# Altium PCB mcc v1.0.0.PcbDoc
Units mm, origin at the board's own origin, x right, y up, seen from the top; angles counter-clockwise.
Board outline 66.63 x 86.36 mm, 4 copper layers (Top Layer, GND, PWR, Bottom Layer); 61 components, 73 nets, 377 pads, 91 vias.
Unrouted connection lines stored in the file: 3.
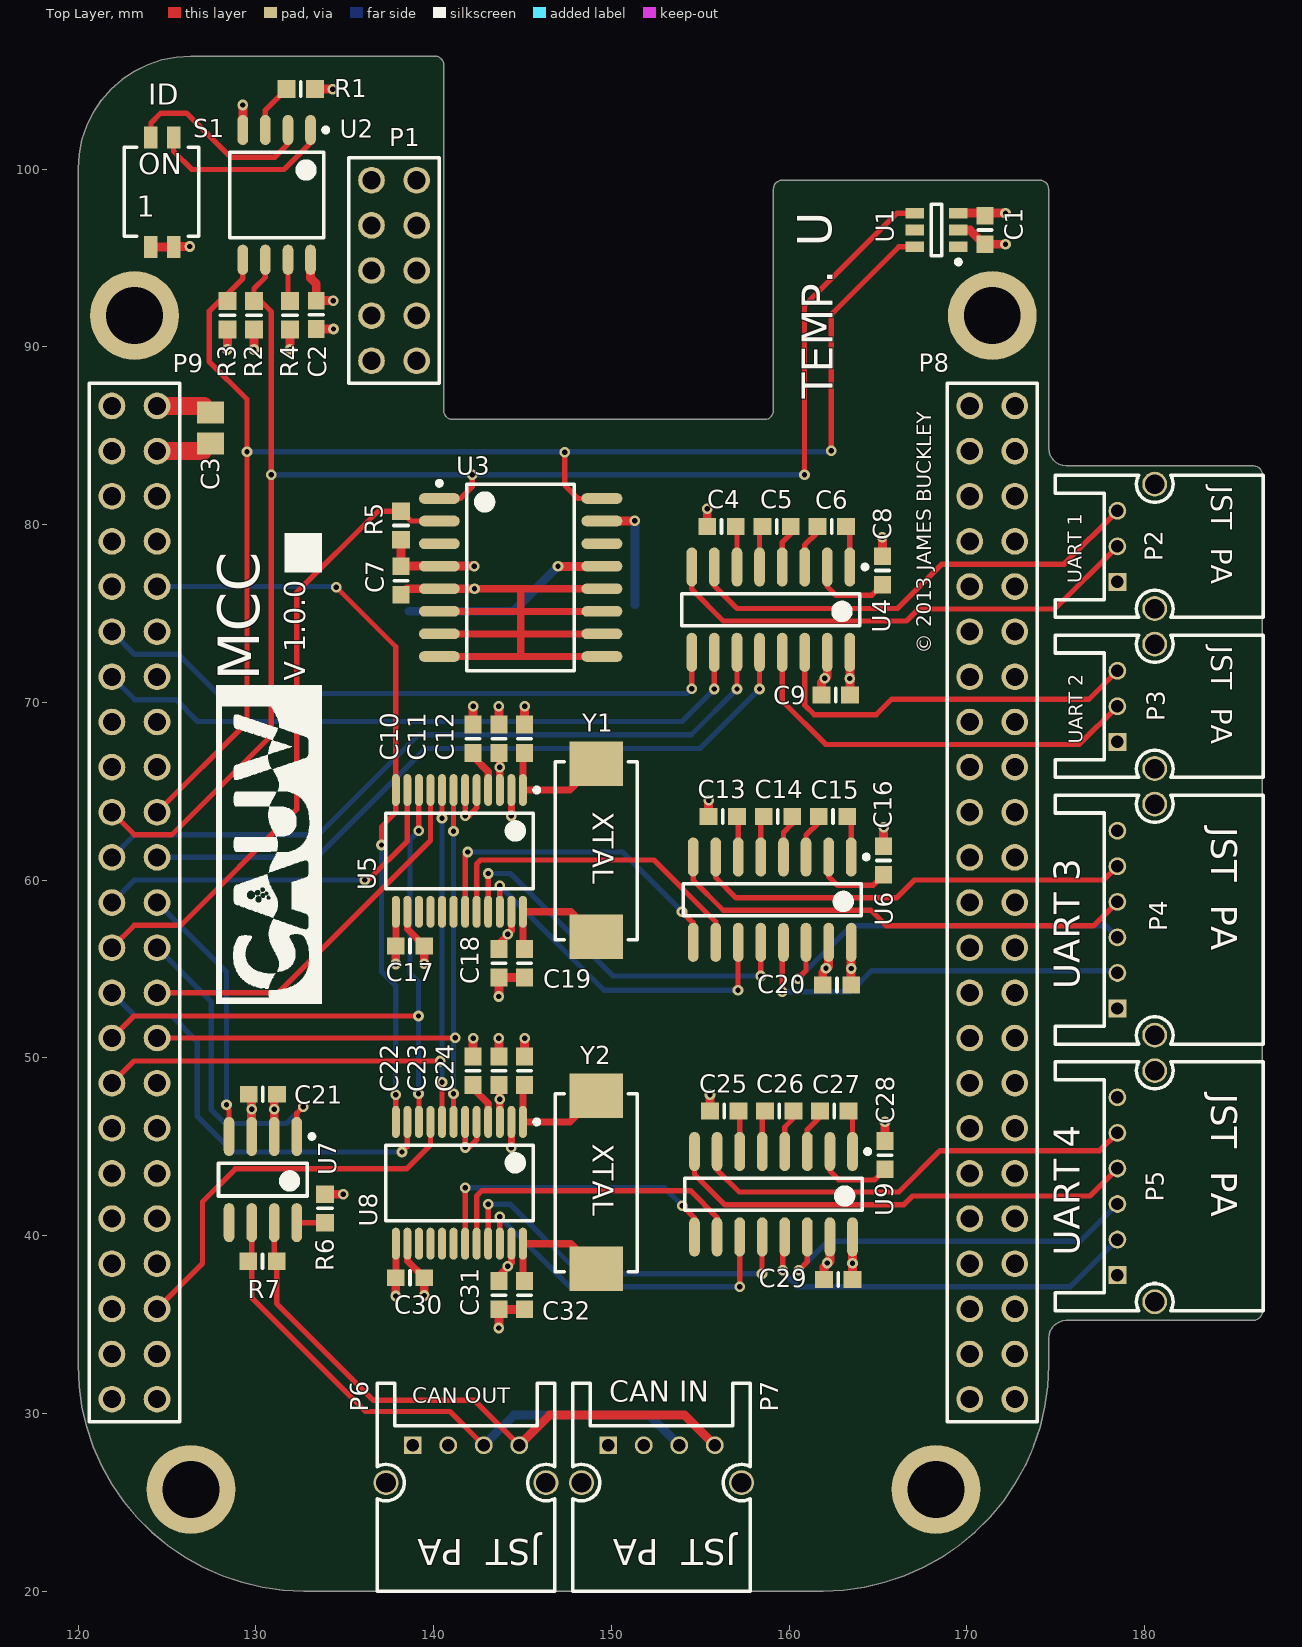
[diagram p0: Top Layer view]
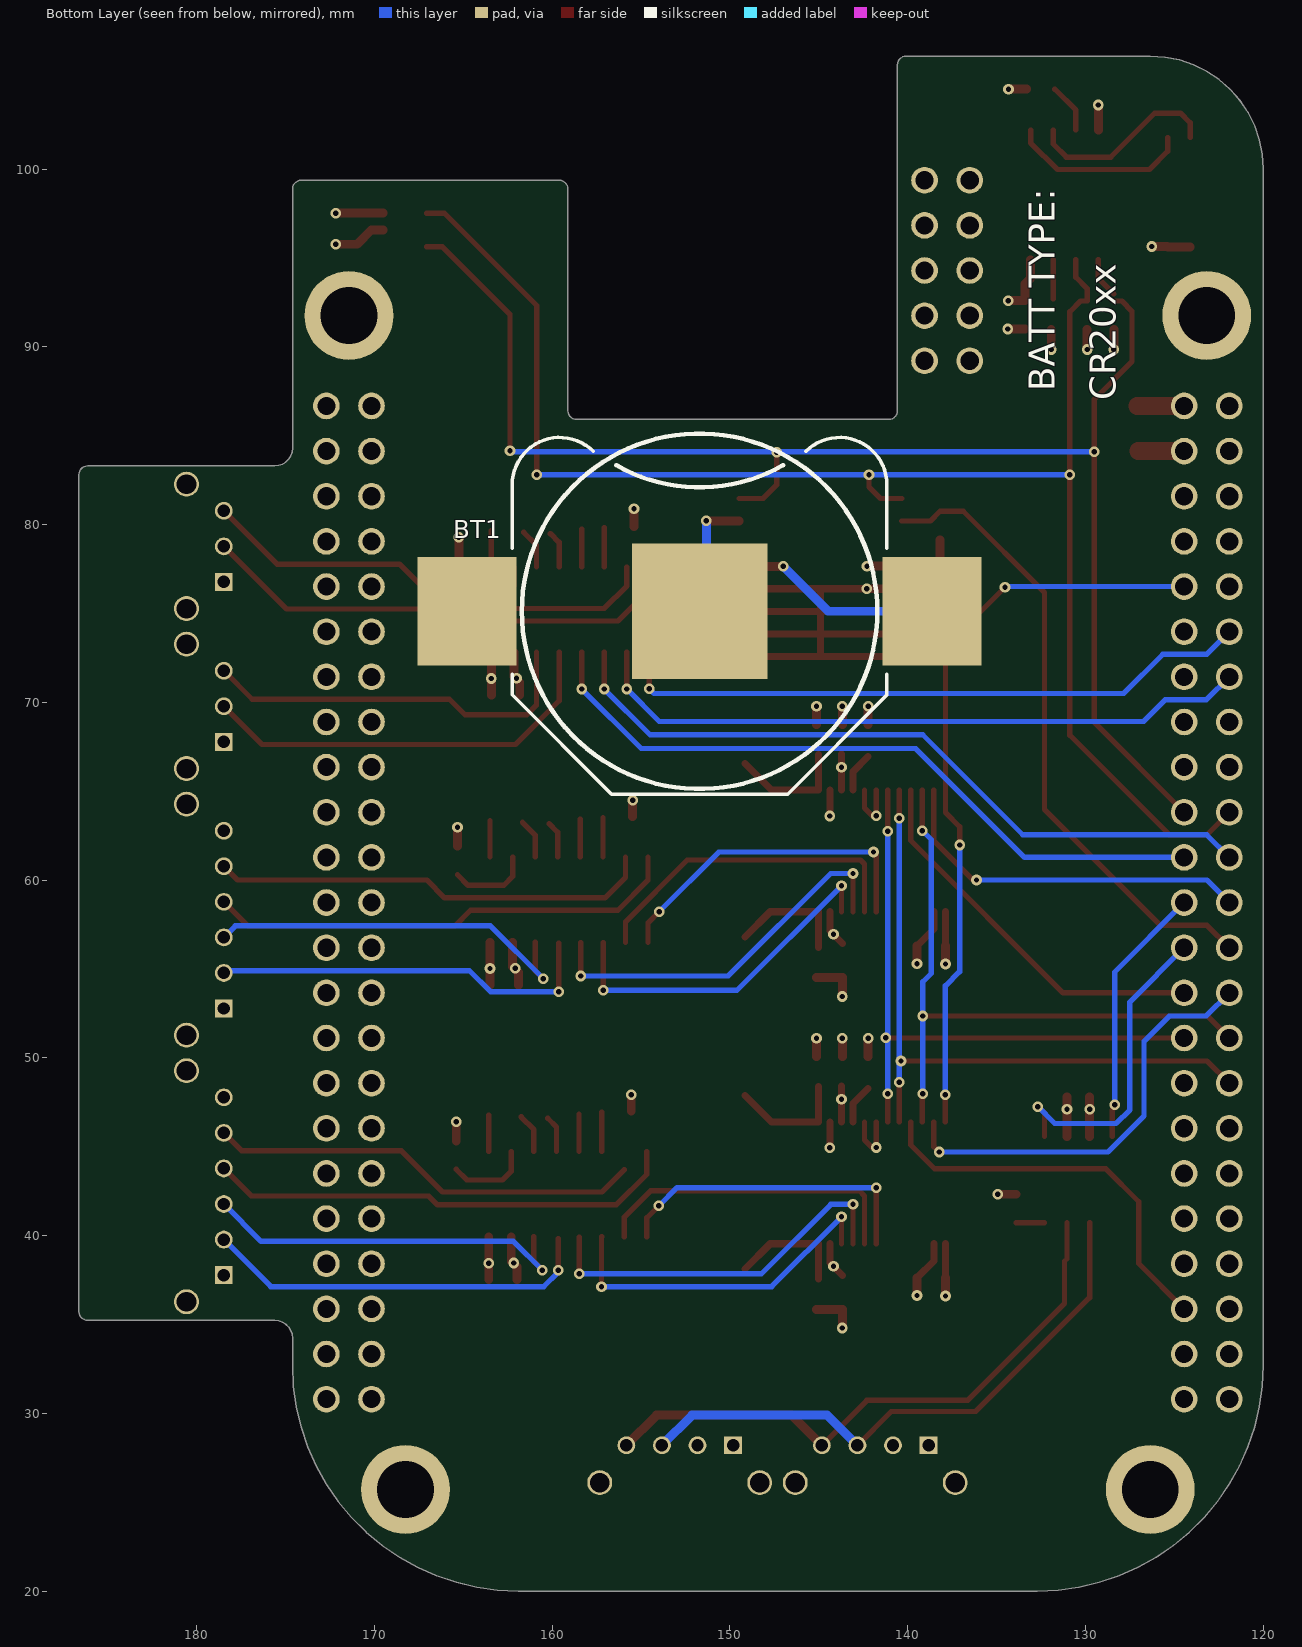
[diagram p1: Bottom Layer view, seen from below]
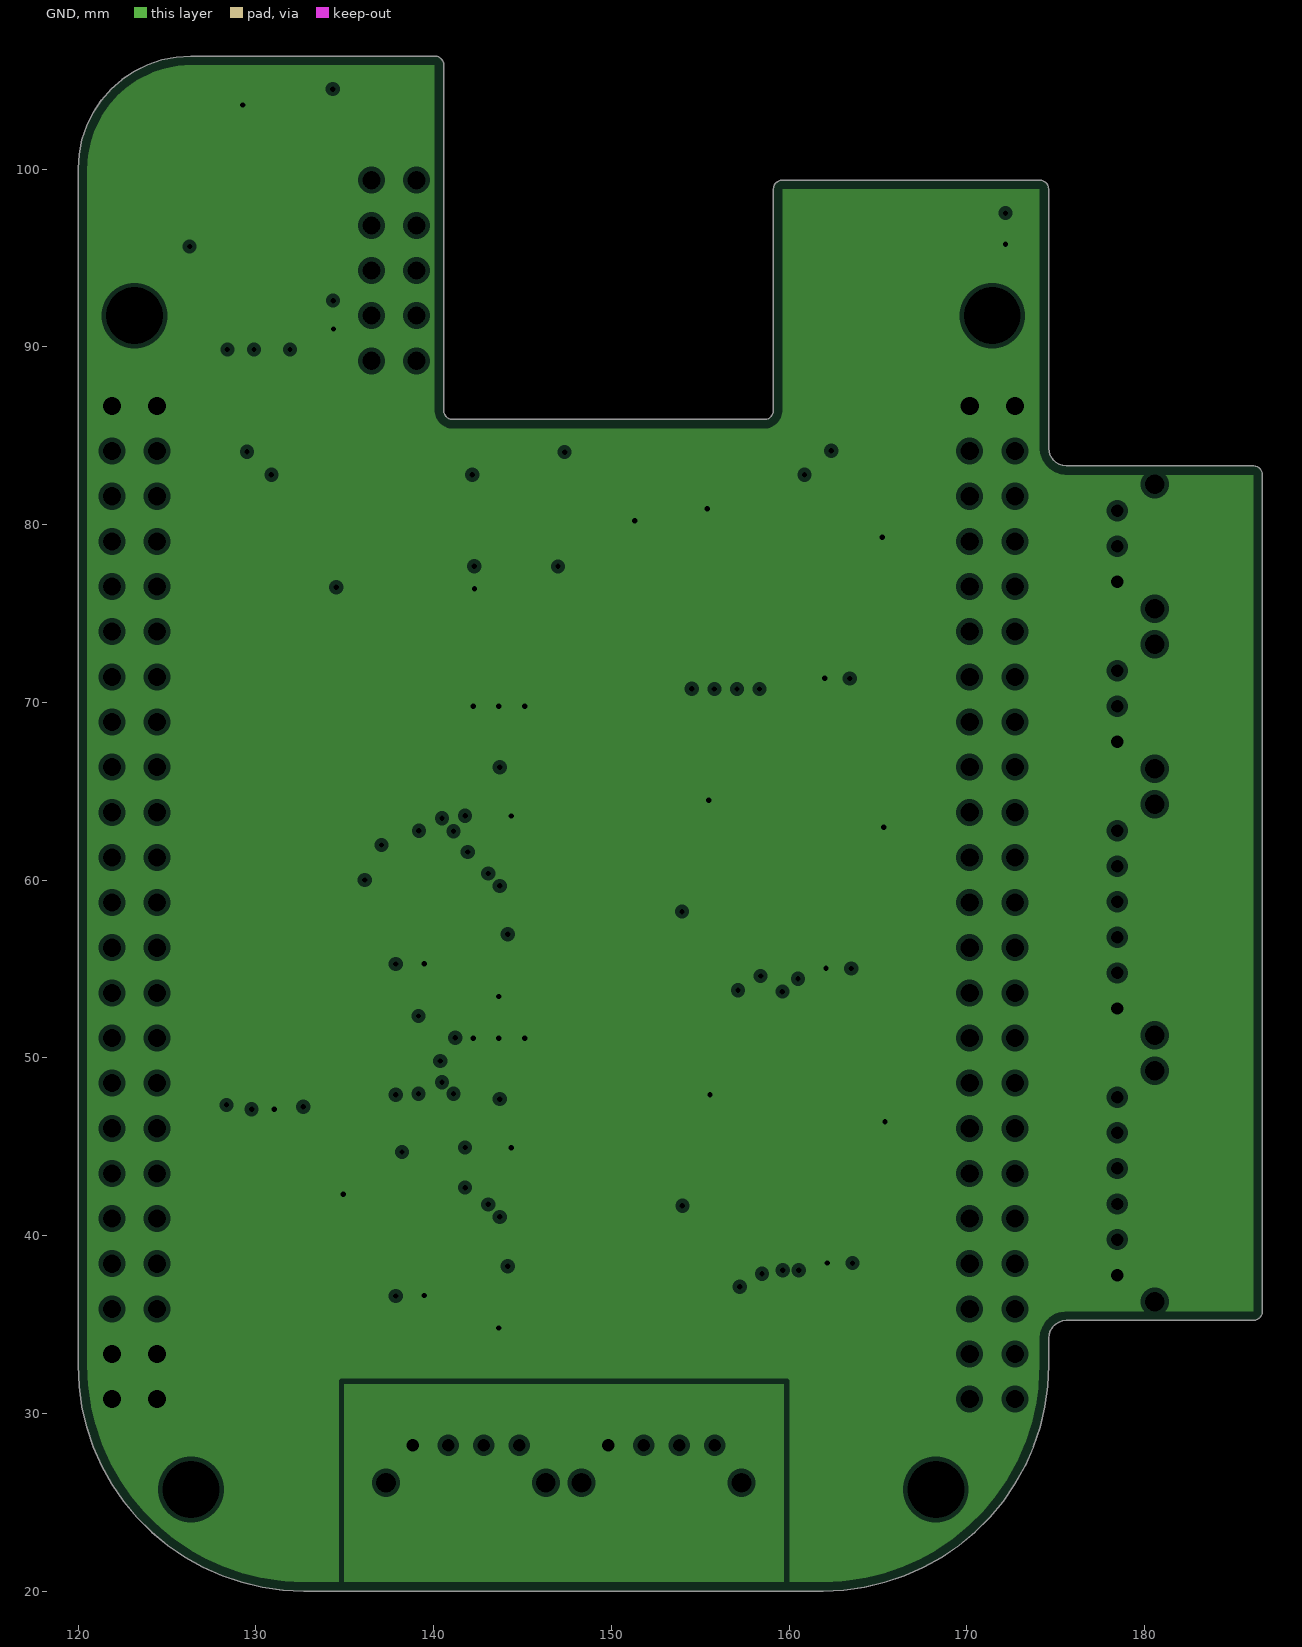
[diagram p2: GND, clearances drawn from the general rule]
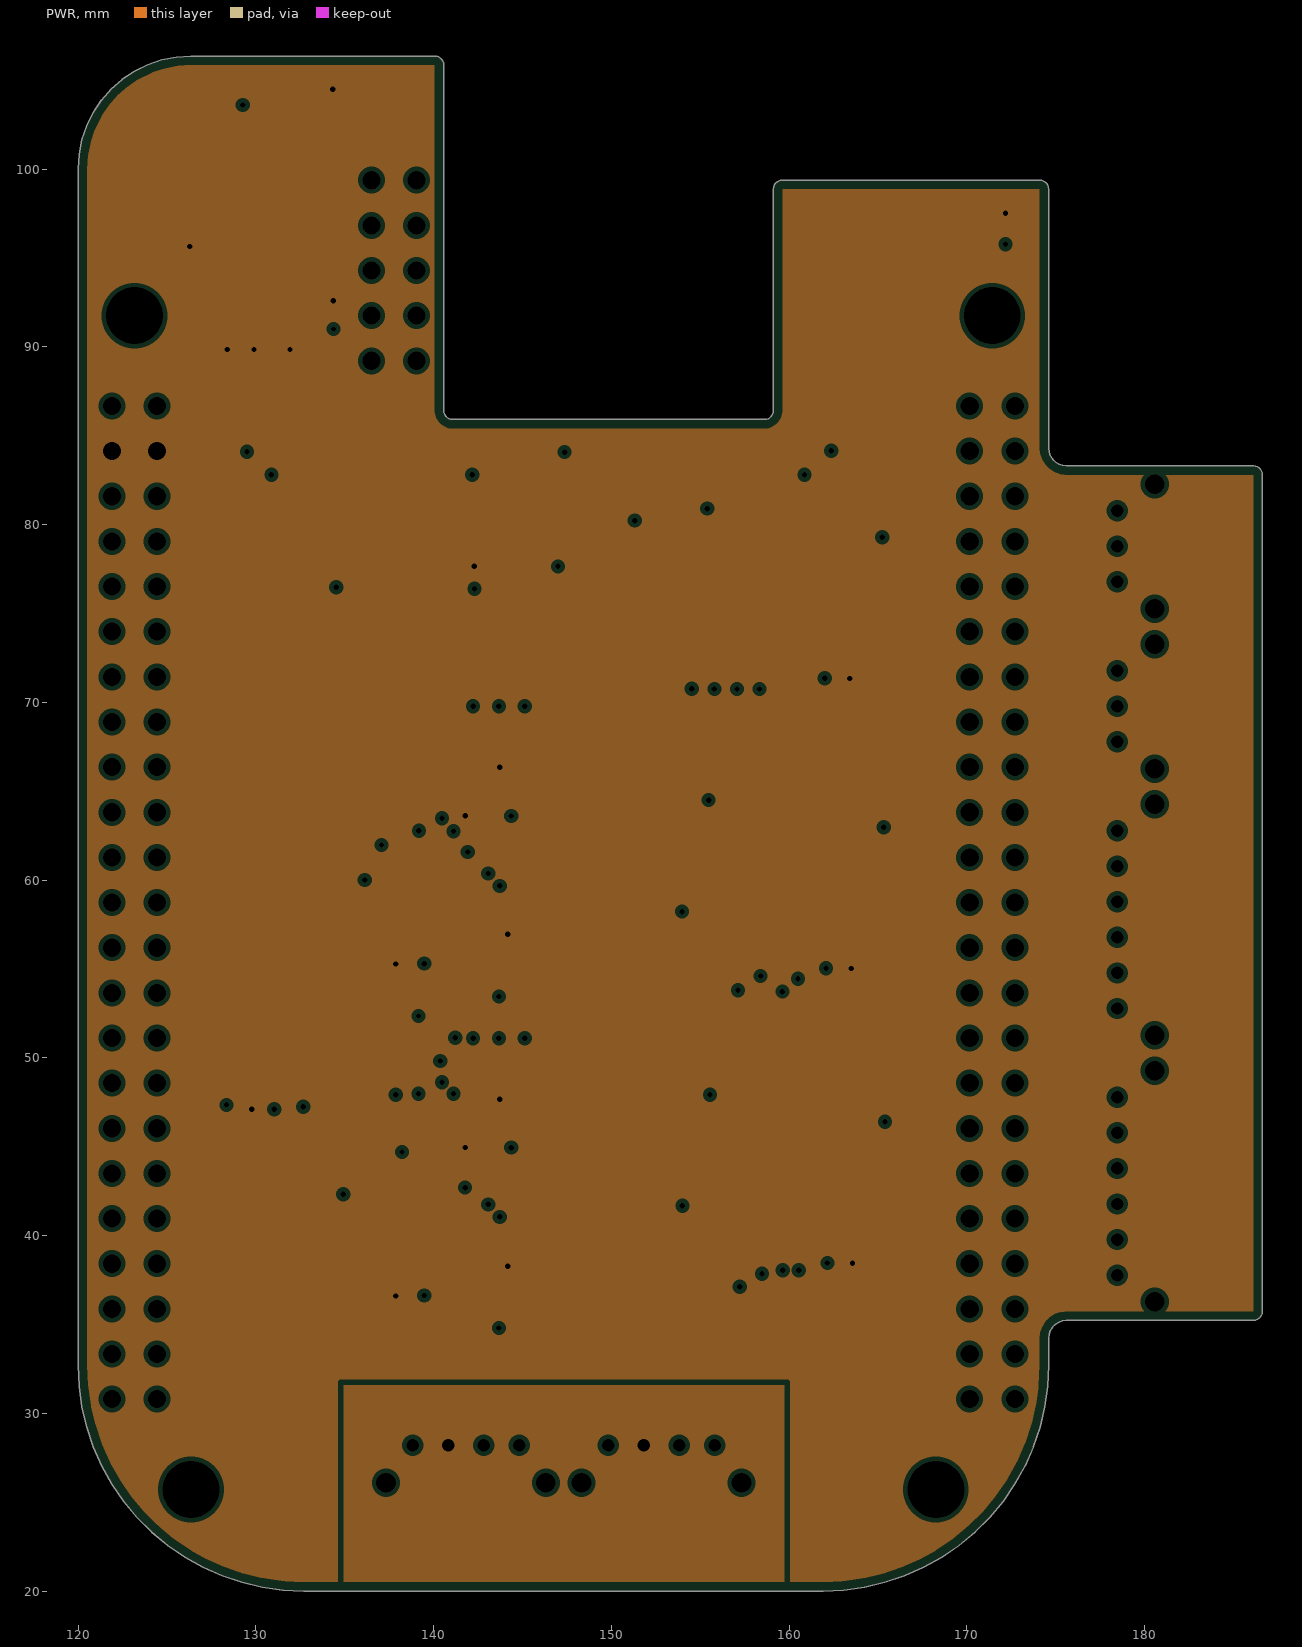
[diagram p3: PWR, clearances drawn from the general rule]

## Layer stack, top to bottom
Top Layer: signal copper 0.0356
Dielectric: core 0.32, FR-4, Dk 4.8
GND: plane copper 0.0356, net GND
Dielectric: prepreg 0.32, FR-4, Dk 4.8
PWR: plane copper 0.0356, net (Multiple Nets)
Dielectric: core 0.32, FR-4, Dk 4.8
Bottom Layer: signal copper 0.0356

## Board outline
159.616,99.375 174.11,99.375 174.221,99.362 174.327,99.325 174.422,99.266 174.501,99.187 174.56,99.092 174.597,98.986 174.61,98.875 174.61,84.305 174.635,84.082 174.709,83.871 174.828,83.681 174.987,83.523 175.176,83.404 175.387,83.33 175.61,83.305 186.13,83.305 186.241,83.292 186.347,83.255 186.442,83.196 186.521,83.117 186.58,83.022 186.617,82.916 186.63,82.805 186.63,35.73 186.617,35.619 186.58,35.513 186.521,35.418 186.442,35.339 186.347,35.279 186.241,35.243 186.13,35.23 175.61,35.23 175.387,35.205 175.176,35.131 174.987,35.012 174.828,34.853 174.709,34.664 174.635,34.453 174.61,34.23 174.61,32.7 174.556,31.528 174.394,30.366 174.125,29.224 173.752,28.112 173.279,27.039 172.708,26.014 172.045,25.047 171.295,24.144 170.466,23.315 169.563,22.565 168.596,21.902 167.571,21.331 166.498,20.858 165.386,20.485 164.244,20.216 163.082,20.054 161.91,20 132.7,20 131.528,20.054 130.366,20.216 129.224,20.485 128.112,20.858 127.039,21.331 126.014,21.902 125.047,22.565 124.144,23.315 123.315,24.144 122.565,25.047 121.902,26.014 121.331,27.039 120.858,28.112 120.485,29.224 120.216,30.366 120.054,31.528 120,32.7 120,100.01 120.054,100.839 120.216,101.653 120.483,102.44 120.851,103.185 121.312,103.876 121.86,104.5 122.484,105.048 123.175,105.509 123.92,105.877 124.706,106.144 125.521,106.306 126.35,106.36 140.074,106.36 140.185,106.347 140.291,106.31 140.386,106.251 140.465,106.172 140.524,106.077 140.561,105.971 140.574,105.86 140.574,86.413 140.587,86.302 140.624,86.196 140.683,86.101 140.762,86.022 140.857,85.963 140.963,85.926 141.074,85.913 158.616,85.913 158.727,85.926 158.833,85.963 158.928,86.022 159.007,86.101 159.066,86.196 159.103,86.302 159.116,86.413 159.116,98.875 159.129,98.986 159.166,99.092 159.225,99.187 159.304,99.266 159.399,99.325 159.505,99.362

## Design rules (kind name [scope] priority, off if disabled: settings)
Clearance [All] p1: gap=0.15
ComponentClearance [All] p1: gap=0.25 collisioncheckmode=3 verticalgap=0.25 showdistances=FALSE
DiffPairsRouting [All] p1: maxlimit=0.3 minlimit=0.2 mostfreqgap=0.26 maxuncoupledlength=12.7
HoleSize [All] p1: absolutevalues=TRUE maxlimit=10 minlimit=0.2 maxpercent=80.000 minpercent=20.000
HoleToHoleClearance [All] p1: gap=0.25 allowstackedmicrovias=TRUE
MinimumAnnularRing [All] p1: minimumring=0.15
MinimumSolderMaskSliver [All] p1: minsoldermaskwidth=0.125
PlaneClearance [All] p1: clearance=0.25
PlaneConnect [All] p1: planeconnectstyle=Relief reliefexpansion=0.5 reliefentries=4 reliefconductorwidth=0.25 reliefairgap=0.25
PolygonConnect [All] p1: connectstyle=Relief reliefconductorwidth=0.25 reliefentries=4 polygonreliefangle="90 Angle"
RoutingVias [All] p1: holewidth=0.3 width=0.6 viastyle="Through Hole" minholewidth=0.3 minwidth=0.6 maxholewidth=0.4 maxwidth=0.8
SilkToSilkClearance [All] p1: silktosilkclearance=0.25
SilkscreenOverComponentPads [All] p1: minsilkscreentomaskgap=0.125
SolderMaskExpansion ViaCovering [(IsVia)] p1: expansion=-10
SolderMaskExpansion [All] p2: expansion=0.125
Width Power [InNetClass('Power')] p1: maxlimit=10 minlimit=0.25 preferedwidth=0.5
Width General [All] p2: maxlimit=10 minlimit=0.2 preferedwidth=0.3
19 further rules are at their usual default settings.

## Classes and differential pairs
component class U_Power: C3
component class U_temp_sensor: C1 U1
component class "U_bb header": P1 P2 P6 P7 P8
component class U_3: C21 R6 U2 U7
component class "U_i2c pullups": R2 R3 R4 R5 R6
net class Power: +3.3 +5 GND
component class "U_CAN Termination Connector (JST)": P5 P6 P7 P8 R3 R7
component class U_eeprom: C2 C21 R1 R4 S1 U2 U7
component class U_MAX31071: C2 C5 C6 C7 C10 C11 C12 C17 C18 C19 C22 C30 U3 U5 Y1
component class U_MAX31072: C10 C11 C12 C13 C14 C18 C22 C23 C24 C30 C31 C32 U4 U8 Y2
component class U_rs232_conn: P2 P3 P4 P5 P6 P7 P8 P9
component class "U_RS232 Transciever (MAX232)1": C4 C5 C6 C8 C9 C13 C17 C19 C25 C32 U3 U4
component class "U_RS232 Transciever (MAX232)2": C5 C9 C13 C14 C15 C16 C20 C22 C23 C26 U4 U6
component class "U_RS232 Transciever (MAX232)3": C1 C6 C15 C25 C26 C27 C28 C29 U6 U9
component class U_rtc: BT1 C7 C8 R5 R7 U3 U9
channel class max3107: U_MAX31071 U_MAX31072
channel class "RS232 Transciever (MAX232)": "U_RS232 Transciever (MAX232)1" "U_RS232 Transciever (MAX232)2" "U_RS232 Transciever (MAX232)3"

## Components (designator, comment, footprint, x,y, rotation, side; value= is the part's Value field where it differs from the comment)
BT1 "Battery" 3002 167.075,75.125 r180 bottom
C1 "Cap" C0603 171.025,96.575 r90 top (schematic designator C9)
C2 "Cap" C0603 133.4,91.8 r90 top (schematic designator C1)
C3 "Cap Pol1" C0805 127.45,85.45 r90 top (schematic designator C1)
C4 "Cap" C0603 156.2,79.891 r180 top (schematic designator C5)
C5 "Cap" C0603 159.3,79.891 r180 top (schematic designator C4)
C6 "Cap" C0603 162.4,79.891 r180 top (schematic designator C3)
C7 "Cap" C0603 138.175,76.85 r270 top (schematic designator C8)
C8 "Cap" C0603 165.25,77.416 r90 top (schematic designator C2)
C9 "Cap" C0603 162.625,70.416 r180 top (schematic designator C1)
C10 "Cap" C0603 142.225,67.95 r270 top (schematic designator C3)
C11 "Cap" C0603 143.675,67.95 r90 top (schematic designator C4)
C12 "Cap" C0603 145.125,67.95 r90 top (schematic designator C6)
C13 "Cap" C0603 156.275,63.575 r180 top (schematic designator C5)
C14 "Cap" C0603 159.375,63.575 r180 top (schematic designator C4)
C15 "Cap" C0603 162.475,63.575 r180 top (schematic designator C3)
C16 "Cap" C0603 165.325,61.1 r90 top (schematic designator C2)
C17 "Cap" C0603 138.675,56.3 r0 top (schematic designator C2)
C18 "Cap" C0603 143.675,55.325 r270 top (schematic designator C5)
C19 "Cap" C0603 145.125,55.325 r270 top (schematic designator C7)
C20 "Cap" C0603 162.7,54.1 r180 top (schematic designator C1)
C21 "Cap" C0603 130.4,47.95 r0 top (schematic designator C1)
C22 "Cap" C0603 142.225,49.275 r270 top (schematic designator C3)
C23 "Cap" C0603 143.675,49.275 r90 top (schematic designator C4)
C24 "Cap" C0603 145.125,49.275 r90 top (schematic designator C6)
C25 "Cap" C0603 156.35,47 r180 top (schematic designator C5)
C26 "Cap" C0603 159.45,47 r180 top (schematic designator C4)
C27 "Cap" C0603 162.55,47 r180 top (schematic designator C3)
C28 "Cap" C0603 165.4,44.525 r90 top (schematic designator C2)
C29 "Cap" C0603 162.775,37.525 r180 top (schematic designator C1)
C30 "Cap" C0603 138.675,37.625 r0 top (schematic designator C2)
C31 "Cap" C0603 143.675,36.65 r270 top (schematic designator C5)
C32 "Cap" C0603 145.125,36.65 r270 top (schematic designator C7)
P1 "Header 5X2" TSW-105-07-T-D_DOWN 139.05,89.215 r90 top
P2 "Header 3H" S03B-PASK-2 178.475,80.775 r270 top (schematic designator P5)
P3 "Header 3H" S03B-PASK-2 178.475,71.775 r270 top (schematic designator P4)
P4 "Header 6H" S06B-PASK-2 178.475,47.775 r270 top (schematic designator P2)
P5 "Header 6H" S06B-PASK-2 178.475,62.775 r270 top (schematic designator P3)
P6 "Header 4" S04B-PASK-2 144.825,28.2 r180 top (schematic designator P1)
P7 "Header 4" S04B-PASK-2 155.825,28.2 r180 top (schematic designator P2)
P8 "Header 23X2" TSW-123-07-T-D_DOWN 170.165,86.675 r270 top
P9 "Header 23X2" TSW-123-07-T-D_DOWN 121.905,86.675 r270 top
R1 "Res2" R0603 132.525,104.5 r0 top
R2 "Res2" R0603 129.9,91.775 r270 top (schematic designator R4)
R3 "Res2" R0603 128.4,91.775 r270 top
R4 "Res2" R0603 131.925,91.775 r270 top (schematic designator R2)
R5 "Res" R0603 138.175,79.95 r90 top
R6 "Res" R0603 133.9,41.525 r270 top (schematic designator R1)
R7 "Res2" R0603 130.375,38.55 r180 top (schematic designator R1)
S1 "SW DIP-2" MCDHN-02F-V 124.1,95.625 r0 top
U1 "AD7414" AD7414 168.3,96.575 r180 top (schematic designator U4)
U2 "CAT24C256" CAT24C256-SOIC 131.175,98.55 r270 top (schematic designator U1)
U3 "DS1374C" DS1374C 144.9,77.025 r0 top
U4 "TRSF3232EID" SOIC127P600X175-16N 158.976,75.216 r270 top (schematic designator U1)
U5 "MAX3107" MAX3107 141.452,61.641 r270 top (schematic designator U2)
U6 "TRSF3232EID" SOIC127P600X175-16N 159.051,58.9 r270 top (schematic designator U1)
U7 "SN65HVD230DR" SN65HVD230DR 130.4,43.15 r270 top (schematic designator U1)
U8 "MAX3107" MAX3107 141.452,42.966 r270 top (schematic designator U2)
U9 "TRSF3232EID" SOIC127P600X175-16N 159.126,42.325 r270 top (schematic designator U1)
Y1 "XTAL" FQ1045A-3.6864 149.15,66.55 r270 top
Y2 "XTAL" FQ1045A-3.6864 149.15,47.875 r270 top (schematic designator Y1)

## Footprints (in the part's own frame and the unit in brackets; to place one, negate y for a bottom-side part, rotate by r counter-clockwise, add the part's x,y. Pads: shape width x height; smd on the part's side, far side on the other; paste and mask are expansions set on the pad)
3002 [mil] "KEYSTONE - 3002 - BATTERY SMD RETAINER, 20MM"
  rect 220x240 smd: 1(90,0) 1(1120,0)
  rect 300x300 smd: 2(605,0)
  silkscreen extent 190,-405 1020,394, body extent 0,-405 1210,384, height 156
AD7414 [mm] "ANALOG DEVICES - AD7414ARTZ-0500RL7. - TEMP SENSOR, 10BIT, SMB/12C, SOT23-6"
  rect 1.05x0.6 smd paste+0 mask+0.175: 1(-1.225,0.95) 2(-1.225,0) 3(-1.225,-0.95) 4(1.225,-0.95) 5(1.225,0) 6(1.225,0.95)
  silkscreen extent -1.35,-1.45 0.3,1.92, body extent -0.8,-1.45 0.8,1.45, height 1.45
C0603 [mm] "Chip Capacitor, 2-Leads, Body 1.6x0.8mm, IPC Medium Density"
  rect 1x0.95 smd: 1(-0.8,0) 2(0.8,0)
  silkscreen extent 0,-0.38 0,0.38, body extent -0.88,-0.48 0.87,0.48, height 0.8
C0805 [mm] "KEMET - C0805C104K5RACTU - CAPACITOR, 0805, 100NF, 50V, X7R"
  rect 1.25x1.5 smd: 1(-0.889,0) 2(0.861,0)
  body extent -1.12,-0.72 1.09,0.72, height 1
CAT24C256-SOIC [mm] "CAT24C256 256 kb I2  C CMOS Serial  EEPROM"
  oval 1.7x0.6 smd: 1(-3.65,1.905) 2(-3.65,0.635) 3(-3.65,-0.635) 4(-3.65,-1.905) 5(3.65,-1.905) 6(3.65,-0.635) 7(3.65,0.635) 8(3.65,1.905)
  silkscreen extent -3.77,-2.65 2.4,2.88, body extent -2.69,-2.67 2.69,2.67, height 2.03
DS1374C [mm] "DS1374 I2C, 32-Bit Binary Counter Watchdog RTC with Trickle Charger and Reset Input/Output"
  oval 2.3x0.6 smd: 1(-4.575,4.445) 2(-4.575,3.175) 3(-4.575,1.905) 4(-4.575,0.635) 5(-4.575,-0.635) 6(-4.575,-1.905) 7(-4.575,-3.175) 8(-4.575,-4.445) 9(4.575,-4.445) 10(4.575,-3.175) 11(4.575,-1.905) 12(4.575,-0.635) 13(4.575,0.635) 14(4.575,1.905) 15(4.575,3.175) 16(4.575,4.445)
  silkscreen extent -4.7,-5.25 3.03,5.42, body extent -3.8,-5.25 3.8,5.25, height 2.65
FQ1045A-3.6864 [mm] "FOX ELECTRONICS - FQ1045A-3.6864 - CRYSTAL, 4.5X10MM, CER, 3.6864MHZ"
  rect 2.5x3 smd: 1(0,0) 2(9.75,0)
  silkscreen extent -0.1,-2.3 9.9,2.3, body extent -0.07,-2.25 9.93,2.25, height 1.7
MAX3107 [mm] "Maxim Integrated MAX3107EAG+"
  oval 1.8x0.45 smd: 1(-3.425,3.575) 2(-3.425,2.925) 3(-3.425,2.275) 4(-3.425,1.625) 5(-3.425,0.975) 6(-3.425,0.325) 7(-3.425,-0.325) 8(-3.425,-0.975) 9(-3.425,-1.625) 10(-3.425,-2.275) 11(-3.425,-2.925) 12(-3.425,-3.575) 13(3.425,-3.575) 14(3.425,-2.925) 15(3.425,-2.275) 16(3.425,-1.625) 17(3.425,-0.975) 18(3.425,-0.325) 19(3.425,0.325) 20(3.425,0.975) 21(3.425,1.625) 22(3.425,2.275) 23(3.425,2.925) 24(3.425,3.575)
  silkscreen extent -3.55,-4.15 2.12,4.47, body extent -2.69,-4.17 2.69,4.17, height 1.99
MCDHN-02F-V [mm] "MULTICOMP - MCDHN-02F-V - SWITCH, DIP, SMD, 2 WAY"
  rect 0.76x1.25 smd: 1(0,0) 2(1.27,0) 3(1.27,6.15) 4(0,6.15)
  silkscreen extent -1.5,0.6 2.7,5.6, body extent -1.3,0.83 2.47,5.33, height 1.5
R0603 [mm]
  rect 1x1 smd: 1(-0.8,0) 2(0.8,0)
  silkscreen extent 0,-0.4 0,0.4, body extent -0.85,-0.48 0.85,0.47, height 0.45
S03B-PASK-2 [mm] "JST (JAPAN SOLDERLESS TERMINALS) - S03B-PASK-2 - HEADER, PA, 3WAY, SIDE, 2MM"
  rect 1x1 hole 0.7: 1(4,0)
  round 1 hole 0.7: 2(2,0) 3(0,0)
  round 1.4 hole 1.1: ""(-1.5,2.1) ""(5.5,2.1)
  silkscreen extent -2,-3.5 6,8.2, body extent -2,-3.5 6,8.2, height 6.5
S04B-PASK-2 [mm] "JST (JAPAN SOLDERLESS TERMINALS) - S04B-PASK-2 - HEADER, PA, 4WAY, SIDE, 2MM"
  rect 1x1 hole 0.7: 1(6,0)
  round 1 hole 0.7: 2(4,0) 3(2,0) 4(0,0)
  round 1.4 hole 1.1: ""(-1.5,2.1) ""(7.5,2.1)
  silkscreen extent -2,-3.5 8,8.2, body extent -2,-3.5 8,8.2, height 6.5
S06B-PASK-2 [mm] "JST (JAPAN SOLDERLESS TERMINALS) - S06B-PASK-2 - HEADER, PA, 6WAY, SIDE, 2MM"
  rect 1x1 hole 0.7: 1(10,0)
  round 1 hole 0.7: 2(8,0) 3(6,0) 4(4,0) 5(2,0) 6(0,0)
  round 1.4 hole 1.1: ""(-1.5,2.1) ""(11.5,2.1)
  silkscreen extent -2,-3.5 12,8.2, body extent -2,-3.5 12,8.2, height 6.5
SN65HVD230DR [mm] "TEXAS INSTRUMENTS - SN65HVD230DR - TRANSCEIVER CAN, 65HVD230, SOIC8"
  oval 2.2x0.6 smd: 1(-2.425,1.905) 2(-2.425,0.635) 3(-2.425,-0.635) 4(-2.425,-1.905) 5(2.425,-1.905) 6(2.425,-0.635) 7(2.425,0.635) 8(2.425,1.905)
  silkscreen extent -2.55,-2.5 0.93,2.88, body extent -2,-2.5 2,2.5, height 1.75
SOIC127P600X175-16N [mm] "SOIC, 16-Leads, Body 10.0x4.0mm (max), Pitch 1.27mm, IPC Medium Density"
  oval 2.2x0.6 smd: 1(-2.4,4.445) 2(-2.4,3.175) 3(-2.4,1.905) 4(-2.4,0.635) 5(-2.4,-0.635) 6(-2.4,-1.905) 7(-2.4,-3.175) 8(-2.4,-4.445) 9(2.4,-4.445) 10(2.4,-3.175) 11(2.4,-1.905) 12(2.4,-0.635) 13(2.4,0.635) 14(2.4,1.905) 15(2.4,3.175) 16(2.4,4.445)
  silkscreen extent -2.52,-5 0.9,5.42, body extent -2,-5 2,5, height 1.75
TSW-105-07-T-D_DOWN [mm] "SAMTEC - TSW-105-T-D - HEADER, 2.54MM, THT VERT, 10WAY"
  round 1.5 hole 1.02: 1(0,0) 2(0,2.54) 3(2.54,0) 4(2.54,2.54) 5(5.08,0) 6(5.08,2.54) 7(7.62,0) 8(7.62,2.54) 9(10.16,0) 10(10.16,2.54)
  silkscreen extent -1.27,-1.27 11.43,3.81, body extent -1.27,-1.27 11.43,3.81, height 2.08
TSW-123-07-T-D_DOWN [mm] "SAMTEC - TSW-123-07-T-D - HEADER, 2.54MM, THT VERT, 46WAY"
  round 1.5 hole 1.02: 1(0,0) 2(0,2.54) 3(2.54,0) 4(2.54,2.54) 5(5.08,0) 6(5.08,2.54) 7(7.62,0) 8(7.62,2.54) 9(10.16,0) 10(10.16,2.54) 11(12.7,0) 12(12.7,2.54) 13(15.24,0) 14(15.24,2.54) 15(17.78,0) 16(17.78,2.54) 17(20.32,0) 18(20.32,2.54) 19(22.86,0) 20(22.86,2.54) 21(25.4,0) 22(25.4,2.54) 23(27.94,0) 24(27.94,2.54) 25(30.48,0) 26(30.48,2.54) 27(33.02,0) 28(33.02,2.54) 29(35.56,0) 30(35.56,2.54) 31(38.1,0) 32(38.1,2.54) 33(40.64,0) 34(40.64,2.54) 35(43.18,0) 36(43.18,2.54) 37(45.72,0) 38(45.72,2.54) 39(48.26,0) 40(48.26,2.54) 41(50.8,0) 42(50.8,2.54) 43(53.34,0) 44(53.34,2.54) 45(55.88,0) 46(55.88,2.54)
  silkscreen extent -1.27,-1.27 57.15,3.81, body extent -1.27,-1.27 57.15,3.81, height 2.08

## Part data
BT1: "Multicell Battery"
C1 C2 C4 C5 C6 C7 C8 C9 C10 C11 C12 C13 C14 C15 C16 C17 C18 C19 C20 C21 C22 C23 C24 C25 C26 C27 C28 C29 C30 C31 C32: "Capacitor"
C3: "Polarized Capacitor (Radial)"
P1: "Header, 5-Pin, Dual row"
P2 P3: "Header, 3-Pin, Right Angle"
P4 P5: "Header, 6-Pin, Right Angle"
P6 P7: "Header, 4-Pin"
P8 P9: "Header, 23-Pin, Dual row"
R1 R2 R3 R4 R7: "Resistor"
R5 R6: library part Res2, "Resistor"
S1: "DIP Switch, 2 Position, SPST"
U1: "ANALOG DEVICES - AD7414ARTZ-0500RL7. - TEMP SENSOR, 10BIT, SMB/12C, SOT23-6"
U2: "CAT24C256 256 kb I2  C CMOS Serial  EEPROM"
U3: "DS1374 I2C, 32-Bit Binary Counter Watchdog RTC with Trickle Charger and Reset Input/Output"
U4 U6 U9: "TEXAS INSTRUMENTS - TRSF3232EID - RS232, 1MBIT, LINE DRIV/REC, 16SOIC"
U5 U8: "Maxim Integrated MAX3107EAG+"
U7: "TEXAS INSTRUMENTS - SN65HVD230DR - TRANSCEIVER CAN, 65HVD230, SOIC8"
Y1 Y2: "Crystal Oscillator"

## Free pads (board coordinates)
  round 5 hole 3.2: 1(123.175,91.755) 1(126.35,25.715) 1(168.26,25.715) 1(171.435,91.755)
  round 0.75 hole 0.75: 1(136.51,89.215) 1(136.51,91.755) 1(136.51,94.295) 1(136.51,96.835) 1(136.51,99.375) 1(139.05,89.215) 1(139.05,91.755) 1(139.05,94.295) 1(139.05,96.835) 1(139.05,99.375)

## Via types
v1: diameter 0.6, hole 0.3, Top Layer to Bottom Layer, 79 vias
v2: diameter 0.6, hole 0.3, Top Layer to Bottom Layer, tented both sides, 12 vias

## Nets (pads, with @x,y where several pads share a name; then routed paths per layer and width w, separated by ;. In a path a pad name is that pad's centre, name@x,y a point inside that pad or via, vN(x,y) a via of type N, cw(c..) or ccw(c..) an arc to the next point about the centre after c; other vN are vias at no path point)
+3.3: C1.2 C2.2 C3.1 C7.1 C9.1 C11.1 C17.1 C18.1 C20.1 C21.1 C23.1 C29.1 C30.1 C31.1 P9.3 P9.4 R1.2 R2.2 R3.2 R4.2 R5.1 S1.1 S1.2 U1.3 U2.8 U3.4 U4.16 U5.3 U5.5 U5.6 U5.13 U5.23 U6.16 U7.3 U8.3 U8.5 U8.6 U8.13 U8.23 U9.16 | length 50.8
  Top Layer w0.3: v1(141.775,44.95) v1@141.777,44.952 ; v1(141.775,63.625) v1@141.777,63.627 ; U8.6 v1@141.777,44.952 ; U5.6 v1@141.777,63.627 ; U8.5 142.427,45.377 142.002,44.952 v1@141.777,44.952 ; U5.5 142.427,64.052 142.002,63.627 v1@141.777,63.627
  Top Layer w0.4: C30.1@137.877,37.627 U8.13 ; C17.1@137.877,56.302 U5.13 ; C31.1@143.675,37.75 144.377,38.452 U8.23 ; C18.1@143.675,56.425 144.377,57.127 U5.23 ; U8.3 C23.1@143.727,48.423 ; U5.3 C11.1@143.727,67.098
  Top Layer w0.5: S1.1 S1.2 125.395,95.65 v1(126.275,95.65) ; v1(128.4,89.85) R3.2 ; U7.3 C21.1@129.765,47.785 ; v1(129.9,89.85) R2.2 ; v1(131.925,89.85) R4.2 ; U2.8 133.08,93.87 133.4,93.55 C2.2 v1(134.35,92.6) ; R1.2 v1(134.325,104.5) ; v1(137.875,36.6) C30.1 ; v1(137.875,55.275) C17.1 ; C7.1 R5.1 ; C7.1@138.185,77.66 U3.4 v1(142.29,77.66) ; C9.1@163.421,70.42 U4.16 ; C20.1@163.496,54.104 U6.16 ; C29.1@163.571,37.529 U9.16 ; U1.3 v1(172.175,97.525)
  Top Layer w1: P9.4 C3.1@127.024,84.135
  other v2: 144.175,38.275 163.571,38.45 129.765,47.1 143.725,47.675 163.496,55.025 144.175,56.95 143.725,66.35 163.421,71.342
+5: P9.7 P9.8
DCAN1_RX: P9.24 U7.4 | length 14.9
  Top Layer w0.3: v1(128.35,47.35) 128.275,47.275 128.495,47.055 U7.4
  Bottom Layer w0.3: P9.24 128.35,54.83 v1(128.35,47.35)
DCAN1_TX: P9.26 U7.1 | length 18.1
  Top Layer w0.3: U7.1 132.305,46.88 v1(132.675,47.25)
  Bottom Layer w0.3: P9.26 127.5,53.14 127.5,47.075 128.275,46.3 131.725,46.3 v1(132.675,47.25)
GND: BT1.2 C1.1 C2.1 C3.2 C4.2 C7.2 C8.2 C9.2 C10.1 C11.2 C12.2 C13.2 C16.2 C17.2 C18.2 C19.2 C20.2 C21.2 C22.1 C23.2 C24.2 C25.2 C28.2 C29.2 C30.2 C31.2 C32.2 P2.1 P3.1 P4.1 P5.1 P6.1 P7.1 P8.1 P8.2 P9.1 P9.2 P9.43 P9.44 P9.45 P9.46 R6.1 U1.2 U2.4 U3.5 U3.6 U3.7 U3.8 U3.9 U3.10 U3.11 U3.12 U3.15 U4.15 U5.2 U5.14 U6.15 U7.2 U8.2 U8.14 U9.15 | length 96.9
  Top Layer w0.4: U8.14 138.527,38.573 C30.2 ; U5.14 138.527,57.248 C17.2 ; U3.8 U3.9 ; U3.7 144.907,73.85 ; U3.6 144.907,75.12 ; U3.5 144.907,76.39 ; v1(144.377,44.948) U8.2 ; v1(144.377,63.602) U5.2 ; 144.907,72.598 144.907,73.85 ; U3.10 144.907,73.85 ; U3.11 144.907,75.12 ; U3.12 144.907,76.39 ; 144.907,73.85 144.907,75.12 ; 144.907,75.12 144.907,76.39
  Top Layer w0.5: U2.4 v1(129.27,103.605) ; U7.2 C21.2@131.035,47.785 ; C2.1 v1(134.375,91) ; R6.1 v1(134.925,42.325) ; C7.2 138.515,76.39 U3.5 v1(142.3,76.39) ; v1(139.475,36.625) C30.2 ; v1(139.475,55.3) C17.2 ; C22.1 v1(142.225,51.1) ; C10.1 v1(142.225,69.775) ; v1(143.675,34.8) C31.2 C32.2 ; C23.2 v1(143.675,51.1) ; v1(143.675,53.45) C18.2 C19.2 ; C11.2 v1(143.675,69.775) ; C24.2 v1(145.125,51.1) ; C12.2 v1(145.125,69.775) ; U3.15 151.325,80.2 v1(151.325,80.225) ; C4.2 v1(155.4,80.9) ; C13.2 v1(155.475,64.5) ; C25.2 v1(155.55,47.925) ; C9.2 161.825,71.116 162.151,71.442 U4.15 ; C20.2 161.9,54.8 162.226,55.126 U6.15 ; C29.2 161.975,38.225 162.301,38.551 U9.15 ; C8.2 165.25,79.166 v1(165.25,79.292) ; C16.2 165.325,62.85 v1(165.325,62.975) ; C28.2 165.4,46.275 v1(165.4,46.4) ; U1.2 170.175,96.575 170.975,95.775 v1(172.175,95.775)
  Top Layer w1: P9.2 C3.2@127.086,86.675
  Bottom Layer w0.5: BT1.2@151.325,75.508 v1(151.325,80.225)
  other v2: 162.159,38.459 131.035,47.1 162.084,55.034 162.009,71.351
I2C2_SCL: P9.19 R2.1 U1.4 U2.6 U3.1 | length 90.1
  Top Layer w0.3: P9.19 123.17,62.55 125.275,62.55 130.875,68.15 v1(130.875,82.804) 130.875,91.975 130.275,92.575 R2.1 129.9,93.275 130.54,93.915 U2.6 ; U3.1 141.52,81.47 142.175,82.125 v1(142.175,82.8) ; v1(160.871,82.804) 160.871,92.321 166.075,97.525 U1.4
  Bottom Layer w0.3: v1(130.875,82.804) v1(160.871,82.804)
I2C2_SDA: P9.20 R3.1 U1.6 U2.5 U3.16 | length 85.8
  Top Layer w0.3: P9.20 129.5,68.87 v1(129.5,84.104) 129.5,87.05 127.375,89.175 127.375,92 127.95,92.575 R3.1 ; R3.1@128.4,92.975 129.27,93.845 U2.5 ; v1(147.375,84.079) 147.375,82.225 148.13,81.47 U3.16 ; v1(162.375,84.15) 162.375,91.825 166.175,95.625 U1.6
  Bottom Layer w0.3: v1(129.5,84.104) 162.329,84.104 v1(162.375,84.15)
IRQ0: P9.23 U5.11 | length 21
  Top Layer w0.3: v1(136.125,60) v1@136.325,60 ; v1@136.3,59.975 v1@136.325,60 ; U5.11 138.527,62.202 v1@136.325,60
  Bottom Layer w0.3: P9.23 123.17,60 v1(136.125,60)
IRQ1: P9.27 U8.11 | length 24.3
  Top Layer w0.3: v1(138.225,44.7) 138.527,45.002 U8.11
  Bottom Layer w0.3: P9.27 123.21,52.35 125.275,52.35 126.7,50.925 126.7,46.725 128.725,44.7 v1(138.225,44.7)
IRQ2: P9.25 R5.2 U3.2 | length 36
  Top Layer w0.3: P9.25 123.16,57.45 125.775,57.45 132.3,63.975 132.3,76.175 136.875,80.75 R5.2 138.725,80.2 U3.2
NetBT1_1: BT1.1 U3.13 | length 11.9
  Top Layer w0.5: v1(147,77.65) U3.13@149.465,77.65
  Bottom Layer w0.5: BT1.1@138.627,75.125 144.475,75.125 v1(147,77.65)
NetC4_2: C10.2 U5.4 | length 2.2
  Top Layer w0.4: C10.2@142.225,66.95 143.077,66.098 U5.4
NetC7_1: C12.1 U5.1 Y1.1 | length 6.7
  Top Layer w0.4: C12.1@145.027,67.052 U5.1 147.666,65.066 Y1.1
NetC8_1: C19.1 U5.24 Y1.2 | length 6.7
  Top Layer w0.4: C19.1@145.027,56.223 U5.24 147.734,58.216 Y1.2
NetC10_2: C22.2 U8.4 | length 2.2
  Top Layer w0.4: C22.2@142.225,48.275 143.077,47.423 U8.4
NetC13_1: C24.1 U8.1 Y2.1 | length 6.7
  Top Layer w0.4: C24.1@145.027,48.377 U8.1 147.666,46.391 Y2.1
NetC14_1: C32.1 U8.24 Y2.2 | length 6.7
  Top Layer w0.4: C32.1@145.027,37.548 U8.24 147.734,39.541 Y2.2
NetC16_1: C8.1 U4.2 | length 4.7
  Top Layer w0.3: U4.2 162.151,76.516 162.65,76.017 164.65,76.017 C8.1
NetC17_1: C6.1 U4.1 | length 2.1
  Top Layer w0.3: U4.1 C6.1@163.421,79.67
NetC17_2: C6.2 U4.3 | length 2.2
  Top Layer w0.3: U4.3 160.881,78.847 C6.2@161.6,79.566
NetC18_1: C5.1 U4.4 | length 2.1
  Top Layer w0.3: U4.4 159.611,79.002 C5.1@160.1,79.491
NetC18_2: C5.2 U4.5 | length 2.1
  Top Layer w0.3: U4.5 C5.2@158.341,79.732
NetC19_1: C4.1 U4.6 | length 2.2
  Top Layer w0.3: U4.6 C4.1@157.071,79.82
NetC21_1: C16.1 U6.2 | length 4.7
  Top Layer w0.3: U6.2 162.226,60.199 162.725,59.7 164.725,59.7 C16.1
NetC22_1: C15.1 U6.1 | length 2.1
  Top Layer w0.3: U6.1 C15.1@163.496,63.354
NetC22_2: C15.2 U6.3 | length 2.2
  Top Layer w0.3: U6.3 160.956,62.531 C15.2@161.675,63.25
NetC23_1: C14.1 U6.4 | length 2.1
  Top Layer w0.3: U6.4 159.686,62.686 C14.1@160.175,63.175
NetC23_2: C14.2 U6.5 | length 2.1
  Top Layer w0.3: U6.5 C14.2@158.416,63.416
NetC24_1: C13.1 U6.6 | length 2.2
  Top Layer w0.3: U6.6 C13.1@157.146,63.504
NetC26_1: C28.1 U9.2 | length 4.7
  Top Layer w0.3: U9.2 162.301,43.624 162.8,43.125 164.8,43.125 C28.1
NetC27_1: C27.1 U9.1 | length 2.1
  Top Layer w0.3: U9.1 C27.1@163.571,46.779
NetC27_2: C27.2 U9.3 | length 2.2
  Top Layer w0.3: U9.3 161.031,45.956 C27.2@161.75,46.675
NetC28_1: C26.1 U9.4 | length 2.1
  Top Layer w0.3: U9.4 159.761,46.111 C26.1@160.25,46.6
NetC28_2: C26.2 U9.5 | length 2.1
  Top Layer w0.3: U9.5 C26.2@158.491,46.841
NetC29_1: C25.1 U9.6 | length 2.2
  Top Layer w0.3: U9.6 C25.1@157.221,46.929
NetP2_10: P9.10 U5.12 U8.12 | length 43
  Top Layer w0.3: v1(134.525,76.475) 137.875,73.125 U5.12@137.875,64.25 ; v1(137.075,61.975) 137.075,63 137.875,63.8 U5.12@137.875,64.25 ; U5.12@137.875,65.064 U5.12@137.875,64.25 ; U8.12 v1(137.877,47.923)
  Bottom Layer w0.3: P9.10 134.485,76.515 v1(134.525,76.475) ; v1(137.075,61.975) 137.075,54.85 137.877,54.048 v1(137.877,47.923)
NetP4_2: P6.2 P7.2
NetP4_3: P6.3 P7.3 R7.2 U7.6 | length 33.1
  Top Layer w0.3: U7.6 129.765,38.55 129.765,36.51 136.175,30.1 140.925,30.1 P6.3
  Bottom Layer w0.5: P6.3 144.525,29.9 152.125,29.9 P7.3
NetP4_4: P6.4 P7.4 R7.1 U7.7 | length 33.8
  Top Layer w0.3: R7.1@131.035,38.69 U7.7 ; R7.1 131.175,36.175 136.625,30.725 142.3,30.725 P6.4
  Top Layer w0.5: P6.4 146.525,29.9 154.125,29.9 P7.4
NetP6_2: P4.2 U9.13 | length 22.1
  Top Layer w0.3: v1(159.65,38.05) U9.13@159.65,39.814
  Bottom Layer w0.3: v1(159.65,38.05) 159.65,37.95 160.475,37.125 175.825,37.125 P4.2
NetP6_3: P4.3 U9.14 | length 21.5
  Top Layer w0.3: v1(160.55,38.05) 161.031,38.531 U9.14
  Bottom Layer w0.3: v1(160.55,38.05) 162.175,39.675 176.375,39.675 P4.3
NetP6_4: P4.4 U9.8 | length 26.6
  Top Layer w0.3: U9.8 154.681,43.444 156.4,41.725 166.45,41.725 166.95,42.225 176.925,42.225 P4.4
NetP6_5: P4.5 U9.7 | length 24.4
  Top Layer w0.3: U9.7@155.951,43.699 157.2,42.45 166.175,42.45 168.5,44.775 177.475,44.775 P4.5
NetP7_2: P3.2 U4.13 | length 23.5
  Top Layer w0.3: U4.13 159.611,70.089 162.075,67.625 176.325,67.625 P3.2
NetP7_3: P3.3 U4.14 | length 21.8
  Top Layer w0.3: U4.14 160.881,69.844 161.425,69.3 164.9,69.3 165.775,70.175 176.875,70.175 P3.3
NetP8_2: P5.2 U6.13 | length 22.1
  Top Layer w0.3: v1(159.625,53.725) U6.13@159.625,56.439
  Bottom Layer w0.3: v1(159.625,53.725) 163.475,53.725 164.65,54.9 178.35,54.9 P5.2
NetP8_3: P5.3 U6.14 | length 21.7
  Top Layer w0.3: v1(160.5,54.45) 160.956,54.906 U6.14
  Bottom Layer w0.3: v1(160.5,54.45) 163.475,57.425 177.825,57.425 P5.3
NetP8_4: P5.4 U6.8 | length 26.8
  Top Layer w0.3: U6.8 154.606,59.994 156.3,58.3 164.6,58.3 165.475,57.425 177.125,57.425 P5.4
NetP8_5: P5.5 U6.7 | length 25
  Top Layer w0.3: U6.7 155.876,60.149 157.025,59 166.05,59 167.05,60 177.7,60 P5.5
NetP9_2: P2.2 U4.8 | length 27.7
  Top Layer w0.3: U4.8 154.531,76.344 156.3,74.575 166.6,74.575 167.275,75.25 174.95,75.25 P2.2
NetP9_3: P2.3 U4.7 | length 26.5
  Top Layer w0.3: U4.7 155.801,76.549 157.075,75.275 166.1,75.275 168.6,77.775 175.475,77.775 P2.3
NetR1_2: R6.2 U7.8 | length 1.6
  Top Layer w0.3: U7.8 R6.2
NetR3_1: R1.1 U2.3 | length 2.8
  Top Layer w0.3: U2.3 130.54,103.315 R1.1
NetR4_1: R4.1 U2.7 | length 2.2
  Top Layer w0.3: R4.1@131.81,92.69 U2.7
NetS1_3: S1.3 U2.1 | length 10.3
  Top Layer w0.3: S1.3 125.37,101.005 126.4,99.975 131.575,99.975 133.08,101.48 U2.1
NetS1_4: S1.4 U2.2 | length 10.9
  Top Layer w0.3: S1.4 124.1,102.6 124.65,103.15 126.1,103.15 128.575,100.675 131.075,100.675 131.81,101.41 U2.2
NetU3_19: U5.19 U6.9 | length 18.8
  Top Layer w0.3: U5.19 141.777,61.427 v1(141.925,61.575) ; v1(153.975,58.225) 154.606,57.594 U6.9
  Bottom Layer w0.3: v1(141.925,61.575) 150.625,61.575 v1(153.975,58.225)
NetU3_20: U5.20 U6.10 | length 18.8
  Top Layer w0.3: U5.20 142.427,60.902 142.65,61.125 152.4,61.125 155.876,57.649 U6.10
NetU3_21: U5.21 U6.12 | length 21.8
  Top Layer w0.3: U5.21 v1(143.077,60.373) ; v1(158.4,54.6) U6.12@158.4,56.484
  Bottom Layer w0.3: v1(143.077,60.373) 144.327,60.373 150.1,54.6 v1(158.4,54.6)
NetU3_22: U5.22 U6.11 | length 20
  Top Layer w0.3: U5.22 v1(143.727,59.673) ; v1(157.125,53.8) U6.11@157.125,56.479
  Bottom Layer w0.3: v1(143.727,59.673) 149.6,53.8 v1(157.125,53.8)
NetU4_19: U8.19 U9.9 | length 17.8
  Top Layer w0.3: U8.19 v1(141.777,42.698) ; v1(154,41.675) 154.681,40.994 U9.9
  Bottom Layer w0.3: v1(141.777,42.698) 152.977,42.698 v1(154,41.675)
NetU4_20: U8.20 U9.10 | length 18.1
  Top Layer w0.3: U8.20 142.427,42.227 142.725,42.525 154.45,42.525 155.951,41.024 U9.10
NetU4_21: U8.21 U9.12 | length 21.3
  Top Layer w0.3: U8.21 143.075,39.544 143.075,41.75 v1(143.077,41.752) ; v1(158.475,37.85) U9.12@158.475,39.909
  Bottom Layer w0.3: v1(143.077,41.752) 144.323,41.752 148.225,37.85 v1(158.475,37.85)
NetU4_22: U8.22 U9.11 | length 19.4
  Top Layer w0.3: v1(143.725,41.05) 143.727,41.048 U8.22 ; U9.11@157.221,39.921 U9.11 ; v1(157.225,37.125) U9.11@157.225,39.921
  Bottom Layer w0.3: v1(143.725,41.05) 147.65,37.125 v1(157.225,37.125)
SPI1_CS0: P9.28 U5.9 | length 21.8
  Top Layer w0.3: P9.28 131.255,53.655 139.827,62.227 U5.9
SPI1_CS1: P9.42 U8.9 | length 22.5
  Top Layer w0.3: P9.42 127,38.43 127,41.9 128.85,43.75 138.475,43.75 139.827,45.102 U8.9
SPI1_MISO: P9.30 U5.7 U8.7 | length 35.5
  Top Layer w0.3: P9.30 141.215,51.115 v1(141.225,51.125) ; v1(141.125,47.975) 141.127,47.973 U8.7 ; v1(141.125,62.75) U5.7@141.125,65.064
  Bottom Layer w0.3: v1(141.125,47.975) v1(141.125,62.75)
SPI1_MOSI: P9.29 U5.10 U8.10 | length 36.8
  Top Layer w0.3: P9.29 123.14,52.35 v1(139.15,52.35) ; v1(139.15,47.975) 139.177,47.948 U8.10 ; v1(139.175,62.775) U5.10@139.175,65.064
  Bottom Layer w0.3: v1(139.15,47.975) 139.15,54.275 138.675,54.75 138.675,62.275 v1(139.175,62.775)
SPI1_SCLK: P9.31 U5.8 U8.8 | length 37.7
  Top Layer w0.3: P9.31 123.155,49.825 v1(140.375,49.825) ; v1(140.475,48.625) 140.477,48.623 U8.8 ; v1(140.475,63.475) U5.8@140.475,65.064
  Bottom Layer w0.3: v1(140.475,48.625) v1(140.475,63.475)
UART2_RXD: P9.22 U4.12 | length 39.9
  Top Layer w0.3: v1(158.341,70.75) U4.12
  Bottom Layer w0.3: P9.22 133.425,61.275 139.55,67.4 154.991,67.4 v1(158.341,70.75)
UART2_TXD: P9.21 U4.11 | length 41.2
  Top Layer w0.3: v1(157.075,70.75) U4.11@157.075,72.812
  Bottom Layer w0.3: P9.21 123.18,62.55 133.525,62.55 139.15,68.175 154.5,68.175 v1(157.075,70.75)
UART4_RXD: P9.11 U4.9 | length 36.2
  Top Layer w0.3: v1(154.531,70.769) U4.9
  Bottom Layer w0.3: P9.11 123.18,72.7 125.65,72.7 127.85,70.5 154.262,70.5 v1(154.531,70.769)
UART4_TXD: P9.13 U4.10 | length 37.8
  Top Layer w0.3: v1(155.801,70.751) U4.10
  Bottom Layer w0.3: P9.13 123.19,70.15 125.5,70.15 126.725,68.925 153.975,68.925 v1(155.801,70.751)
pads on no net: P1.1 P1.2 P1.3 P1.4 P1.5 P1.6 P1.7 P1.8 P1.9 P1.10 P2. P3. P4. P4.6 P5. P5.6 P6. P7. P8.3 P8.4 P8.5 P8.6 P8.7 P8.8 P8.9 P8.10 P8.11 P8.12 P8.13 P8.14 P8.15 P8.16 P8.17 P8.18 P8.19 P8.20 P8.21 P8.22 P8.23 P8.24 P8.25 P8.26 P8.27 P8.28 P8.29 P8.30 P8.31 P8.32 P8.33 P8.34 P8.35 P8.36 P8.37 P8.38 P8.39 P8.40 P8.41 P8.42 P8.43 P8.44 P8.45 P8.46 P9.5 P9.6 P9.9 P9.12 P9.14 P9.15 P9.16 P9.17 P9.18 P9.32 P9.33 P9.34 P9.35 P9.36 P9.37 P9.38 P9.39 P9.40 P9.41 U1.1 U1.5 U3.3 U3.14 U5.15 U5.16 U5.17 U5.18 U7.5 U8.15 U8.16 U8.17 U8.18

## Polygon pours and split planes (outlines as drawn)
GND on GND (split plane): 273 vertices, not listed, extent 120.51,20.51 186.12,105.85
GND on GND (split plane): 159.724,20.51 134.976,20.51 134.976,31.649 159.724,31.649
+3.3 on PWR (split plane): 273 vertices, not listed, extent 120.51,20.51 186.12,105.85
NetP4_2 on PWR (split plane): 159.749,20.51 134.926,20.51 134.926,31.599 159.749,31.599

## Other copper
GND (plane layer: these items are gaps in the copper):
  lines w0.3: 134.825,19.95 134.825,31.8 159.875,31.8 159.875,19.95
PWR (plane layer: these items are gaps in the copper):
  lines w0.3: 134.775,19.95 134.775,31.75 159.9,31.75 159.9,19.95

## Silkscreen, mask and mechanical layers (free items; w line width, h text height)
Top Overlay:
  drawing of 11 lines, arcs and shapes, not listed
  text "ID" at 123.95,103.225 h2
  text "U" at 163.05,95.625 h3.34 r90
  text "TEMP." at 163.05,87.075 h3 r90
  text "UART 1" at 176.753,76.708 h1.35 r90
  text "© 2013 JAMES BUCKLEY" at 168.276,72.736 h1.4 r90
  text "MCC" at 130.98,71.211 h4 r90
  text "V 1.0.0" at 133.18,71.211 h2 r90
  text "UART 2" at 176.803,67.683 h1.35 r90
  text "UART 3" at 176.825,53.85 h2.5 r90
  text "UART 4" at 176.825,38.85 h2.5 r90
  text "CAN OUT" at 138.8,30.246 h1.5
  text "CAN IN" at 149.875,30.25 h2
Bottom Overlay:
  text "BATT TYPE:" at 131.25,87.5 h2.5 r270
  text "CR20xx" at 127.825,87 h2.5 r270
Mechanical 19:
  lines w0.025: 120,32.7 120,100.01 120.054,100.839 120.216,101.653 120.483,102.44 120.851,103.185 121.312,103.876 121.86,104.5 122.484,105.048 123.175,105.509 123.92,105.877 124.706,106.144 125.521,106.306 126.35,106.36 139.558,106.36 cw(c139.558,105.344) 140.574,105.344 140.574,86.421 ccw(c141.082,86.421) 141.082,85.913 158.608,85.913 ccw(c158.608,86.421) 159.116,86.421 ; 120.054,31.528 120.216,30.366 120.485,29.224 120.858,28.112 121.331,27.039 121.902,26.014 122.565,25.047 123.315,24.144 124.144,23.315 125.047,22.565 126.014,21.902 127.039,21.331 128.112,20.858 129.224,20.485 130.366,20.216 131.528,20.054 132.7,20 161.91,20 163.082,20.054 164.244,20.216 165.385,20.485 166.498,20.858 167.571,21.331 168.596,21.902 169.563,22.565 170.466,23.315 171.295,24.144 172.045,25.047 172.708,26.014 173.279,27.039 173.752,28.112 174.125,29.224 174.394,30.366 174.556,31.528 174.61,32.7 174.61,98.359 ccw(c173.594,98.359) 173.594,99.375 160.132,99.375

## Text inside footprints (layer, text, board x,y; h text height)
P2: Top Overlay "JST  PA" at 183.375,82.175 h2 r270
P3: Top Overlay "JST  PA" at 183.375,73.175 h2 r270
P4: Top Overlay "JST  PA" at 183.275,47.975 h2.5 r270
P5: Top Overlay "JST  PA" at 183.275,62.975 h2.5 r270
P6: Top Overlay "JST  PA" at 146.025,23.4 h2.5 r180
P7: Top Overlay "JST  PA" at 157.025,23.4 h2.5 r180
S1: Top Overlay "1" at 123.3,96.925 h2; Top Overlay "ON" at 123.4,99.325 h2